# EAGLE board 1A_Main_Front (EAGLE 7.7.0)

Size 71.5 x 24 mm. Coordinates in mm from the lower left corner, seen from the top.
Outline: 10.56,11.3 arc90 9.96,10.7 9.96,9.27 arc45 10.08,8.98 10.44,8.62 arc-45 10.56,8.33 10.56,7.5 arc90 11.56,6.8 16.76,6.8 arc90 17.76,7.5 17.76,8.33 arc-45 17.88,8.62 18.24,8.98 arc45 18.36,9.27 18.36,10.7 arc90 17.76,11.3 10.56,11.3
Copper layers (1*16): Top 0.035mm / dielectric 1.5mm / Bottom 0.035mm
Design rules "default": minimum track width 10mil, minimum drill 24mil, track to track 8mil, track to pad 8mil, pad to pad 8mil, via to via 8mil, smd to smd 8mil, copper to edge 40mil, drill to drill 8mil, minimum pad ring 10mil, minimum via ring 8mil, stop-mask expansion 4mil, vias tented up to drill 0mil, thermal gap 10mil
Holes 4.2 mm at 58.61,10.8
Holes 2 mm at 45.91,17.26 45.91,14.72 45.91,12.18 45.91,9.64

## Footprints (pad centres in the part's own frame; a part is rotated, then mirrored left to right if it is on the bottom)
PANEL = hole 3.2: -31.75,12; 31.75,12
RIA_AKL182-04 = hole 0.6: -7.9,15.9; -7.9,7; 7.9,15.9; 7.9,7

## Placement (x,y rotation side)
E$1  [PANEL]  35.75,0 0 top
E$2  [RIA_AKL182-04]  31.94,0 0 top

## Library data of the parts
E$1 E$2 = AllSerialv2

## Text on the board
Top: AllSerial / FTDI | GND | 12 V | 5 V | 3.3 V | PWR | RX | USB | Reset | TX | TXEN | V iso
tStop: AllSerial / FTDI | GND | 12 V | 5 V | 3.3 V | PWR | RX | USB | Reset | TX | TXEN | V iso